# Altium PCB LCDTestor_LPC1788.PcbDoc
Units mm, origin at the board's own origin, x right, y up, seen from the top; angles counter-clockwise.
Board outline 152.4 x 101.6 mm, 2 copper layers (Top Layer, Bottom Layer); 149 components, 251 nets, 806 pads, 22 vias.
Unrouted connection lines stored in the file: 59.
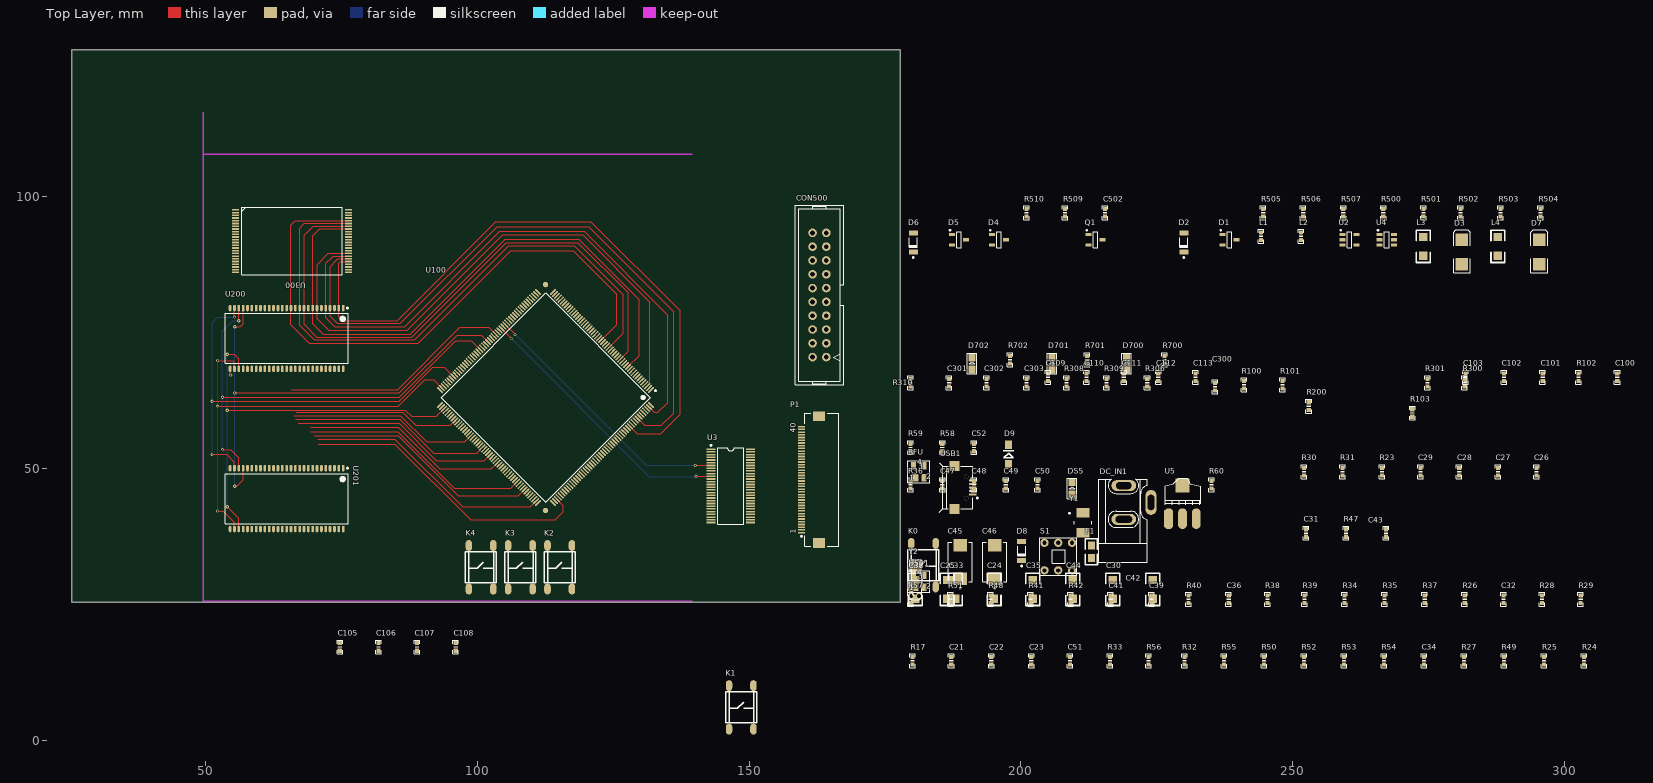
[diagram p0: Top Layer view]
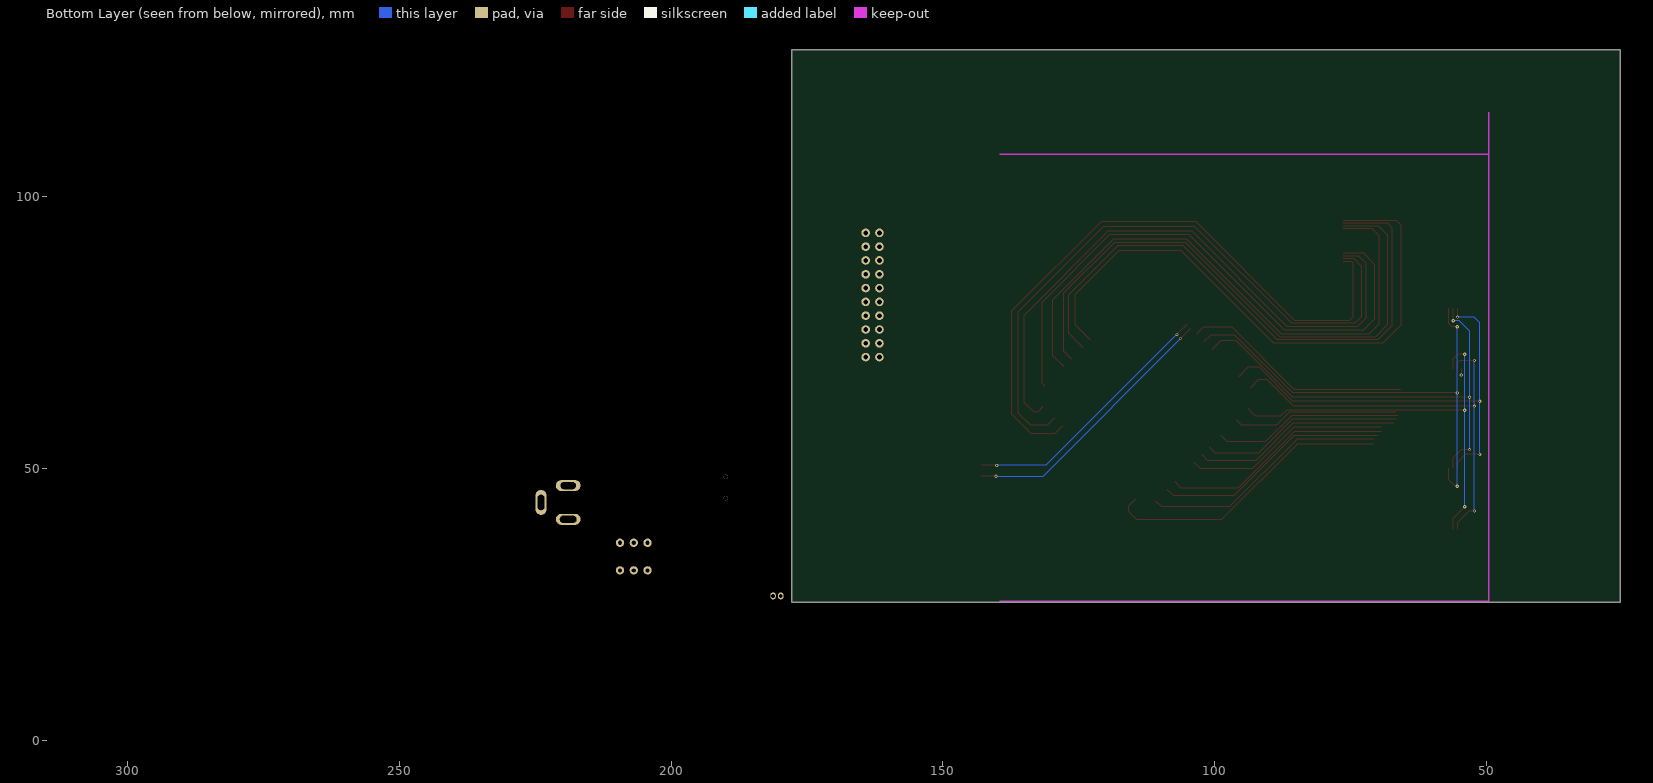
[diagram p1: Bottom Layer view, seen from below]

## Layer stack, top to bottom
Top Layer: signal copper 0.0356
Dielectric: dielectric 0.32, FR-4, Dk 4.8
Bottom Layer: signal copper 0.0356

## Board outline
25.4,25.4 177.8,25.4 177.8,127 25.4,127

## Design rules (kind name [scope] priority, off if disabled: settings)
Clearance [All] p1: gap=0.178
DiffPairsRouting [All] p1: maxlimit=0.254 minlimit=0.254 mostfreqgap=0.254 maxuncoupledlength=12.7
PolygonConnect [All] p1: connectstyle=Relief reliefconductorwidth=0.254 reliefentries=4 polygonreliefangle="90 Angle"
RoutingVias [All] p1: holewidth=0.3 width=0.6 viastyle="Through Hole" minholewidth=0.3 minwidth=0.6 maxholewidth=0.3 maxwidth=0.6
SilkToSilkClearance [All] p1: silktosilkclearance=0
SilkscreenOverComponentPads [All] p1: minsilkscreentomaskgap=0.01
SolderMaskExpansion [All] p1: expansion=0.102
Width [All] p1: maxlimit=1.524 minlimit=0.127 preferedwidth=0.254
25 further rules are at their usual default settings.

## Classes and differential pairs
component class 11)KEY,LED: D700 D701 D702 K1 K2 K3 K4 R700 R701 R702
component class 07)Power,JTAG,RESET: C45 C46 C47 C48 C49 C50 C502 CON500 CT500 CT501 CT502 CT503 D8 D500 D501 DC_IN1 DS5 DW500 DW501 DW502 DW503 F1 K0 K500 R36 R60 R500 R501 R502 R503 R504 R505 R506 R507 R509 R510 S1 TP500 TP501 TP502 TP503 U5 U500 U501 U502
component class 05)NorFlash,NandFlash: C300 C301 C302 C303 JP300 R300 R301 R306 R308 R309 R310 U300 U301 U302
component class 06)LCD: C21 C22 C23 C24 C25 C26 C27 C28 C29 C30 C31 C32 C33 C34 C35 C36 C37 C38 C39 C41 C42 C43 C44 C51 C400 C402 C404 C406 C411 C414 C418 C420 C422 D1 D2 D3 D4 D5 D6 D7 L1 L2 L3 L4 P1 Q1 R17 R23 R24 R25 R26 R27 R28 R29 R30 R31 R32 R33 R34 R35 R37 R38 R39 R40 R41 R42 R47 R48 R49 R50 R51 R52 R53 R54 R55 R56 R57 U2 U3 U4
component class 04)SDRAM: C200 C201 C202 C203 C204 C205 C206 C207 C208 C209 C210 C211 C212 C213 C304 C305 C306 C307 C308 C309 JP1 R8 R9 R10 R11 R12 R13 R14 R15 R16 R200 U6 U200 U201 VD6 VD7
net class D[31..0]: D0 D1 D2 D3 D4 D5 D6 D7 D8 D9 D10 D11 D12 D13 D14 D15 D16 D17 D18 D19 D20 D21 D22 D23 D24 D25 D26 D27 D28 D29 D30 D31 D500 D501 D502 D503 D504 D505 D506
net class A[23..0]: A0 A1 A2 A3 A4 A5 A6 A7 A8 A9 A10 A11 A12 A13 A14 A15 A16 A17 A18 A19 A20 A21 A22 A23
component class 03)CPU-3: C100 C101 C102 C103 C104 C105 C106 C107 C108 C109 C110 C111 C112 C113 C210 C211 C212 C213 P0_5 R100 R101 R102 R103 R201 R202 R203 VD2 VD3 VD4 X1 Y1 Y2
component class 01)CPU-1: U100
component class "10)USB HOST,USB Device,": BFU C52 D9 R58 R59 USB1
differential pair RXIN3: +RXIN3_P -RXIN3_N
differential pair RXIN2: +RXIN2_P -RXIN2_N
differential pair RXIN1: +RXIN1_P -RXIN1_N
differential pair RXIN0: +RXIN0_P -RXIN0_N
differential pair RXCLKIN: +RXCLKIN_P -RXCLKIN_N
differential pair USB_D: +USB_D_P -USB_D_N

## Components (designator, comment, footprint, x,y, rotation, side; value= is the part's Value field where it differs from the comment)
BFU "SP0503" SOT143 181.229,49.403 r0 top
C21 "104" 0603P 187.198,14.605 r90 top
C22 "104" 0603P 194.564,14.605 r90 top
C23 "104" 0603P 201.93,14.605 r90 top
C24 "10uF/25V" 1206 195.072,26.035 r90 top
C25 "10uF/25V" 1206 186.436,26.035 r90 top
C26 "104" 0603P 294.894,49.403 r90 top
C27 "104" 0603P 287.782,49.403 r90 top
C28 "104" 0603P 280.67,49.403 r90 top
C29 "104" 0603P 273.558,49.403 r90 top
C30 "10uF/25V" 1206 216.916,26.035 r90 top
C31 "104" 0603P 252.476,38.1 r90 top
C32 "104" 0603P 288.798,25.908 r90 top
C33 "10uF/25V" 1206 187.96,26.035 r90 top
C34 "104" 0603P 274.193,14.605 r90 top
C35 "2.2uF/25V" 1206 202.184,26.035 r90 top
C36 "104" 0603P 238.252,25.908 r90 top
C37 "10uF/25V" 1206 180.594,26.035 r90 top
C38 "10uF/25V" 1206 180.594,26.035 r90 top
C39 "104" 0603P 224.028,25.908 r90 top
C41 "104" 0603P 216.535,25.908 r90 top
C42 "10uF/25V" 1206 224.282,26.035 r90 top
C43 "104" 0603P 267.208,38.1 r90 top
C44 "2.2uF/25V" 1206 209.55,26.035 r90 top
C45 "Cap Tantalum" 7343 188.849,32.766 r90 top
C46 "Cap Tantalum" 7343 195.199,32.766 r90 top
C47 "22uF" 0603P 185.547,46.99 r90 top
C48 "22uF" 0603P 191.389,46.99 r90 top
C49 "104" 0603P 197.231,46.99 r90 top
C50 "104" 0603P 203.073,46.99 r90 top
C51 "104" 0603P 209.042,14.605 r90 top
C52 "104" 0603P 191.389,53.848 r90 top
C100 "22P" 0603P 309.753,66.802 r90 top
C101 "22P" 0603P 296.037,66.802 r90 top
C102 "22P" 0603P 288.925,66.802 r90 top
C103 "22P" 0603P 281.813,66.802 r90 top
C105 "104" 0603P 74.676,17.145 r90 top
C106 "104" 0603P 81.788,17.145 r90 top
C107 "104" 0603P 88.9,17.145 r90 top
C108 "104" 0603P 96.012,17.145 r90 top
C109 "104" 0603P 204.978,66.802 r90 top
C110 "104" 0603P 212.09,66.802 r90 top
C111 "104" 0603P 218.948,66.802 r90 top
C112 "104" 0603P 225.298,66.802 r90 top
C113 "104" 0603P 232.156,66.802 r90 top
C300 "104" 0603P 235.712,65.024 r90 top
C301 "104" 0603P 186.817,65.786 r90 top
C302 "104" 0603P 193.675,65.786 r90 top
C303 "104" 0603P 201.041,65.786 r90 top
C502 "104" 0603P 215.519,97.028 r90 top
CON500 "JTAG_20Pin" JTAG_20 162.941,81.915 r90 top
D1 "BAV99" SOT-23-3L 238.379,92.075 r0 top
D2 "ZMM18" LL-34 229.997,91.567 r90 top
D3 "MBR0520" DSO-C2/X2.3 281.178,89.789 r90 top
D4 "BAV99" SOT-23-3L 195.961,92.075 r0 top
D5 "BAV99" SOT-23-3L 188.595,92.075 r0 top
D6 "ZMM10" LL-34 180.213,91.567 r90 top
D7 "MBR0520" DSO-C2/X2.3 295.402,89.789 r90 top
D8 "ZMM5V1" LL-34 200.152,34.798 r90 top
D9 "1N4148" DIODE_SOP 197.739,50.8 r90 top
D700 "LED" SMDLED 219.456,68.199 r90 top
D701 "LED" SMDLED 205.74,68.199 r90 top
D702 "LED" SMDLED 191.008,68.199 r90 top
DC_IN1 "POWER" DC10B 223.266,36.195 r90 top
DS5 "LED1" SMDLED 209.423,45.212 r90 top
F1 "Fuse 1" 0805 212.979,33.528 r90 top
K0 "KEY_M" K贴片 179.832,28.194 r0 top
K1 "KEY_M" K贴片 146.304,2.032 r0 top
K2 "KEY_M" K贴片 112.903,27.813 r0 top
K3 "KEY_M" K贴片 105.664,27.813 r0 top
K4 "KEY_M" K贴片 98.425,27.813 r0 top
L1 "Inductor" 0603P 244.221,92.71 r90 top
L2 "Inductor" 0603P 251.587,92.71 r90 top
L3 "Inductor" 1206 274.066,89.154 r90 top
L4 "Inductor" 1206 287.782,89.154 r90 top
P1 "MHDR2X20" FH12A-40S-0.5SH 161.264,47.938 r90 top
Q1 "2N3904" SOT-23-3L 213.741,92.075 r0 top
R17 "1.5K" 0603P 180.086,14.605 r90 top
R23 "10K" 0603P 266.446,49.403 r90 top
R24 "10K" 0603P 303.657,14.605 r90 top
R25 "100K  %1" 0603P 296.291,14.605 r90 top
R26 "10K" 0603P 281.686,25.908 r90 top
R27 "100K" 0603P 281.559,14.605 r90 top
R28 "10K" 0603P 295.91,25.908 r90 top
R29 "10K" 0603P 303.022,25.908 r90 top
R30 "10K" 0603P 252.095,49.403 r90 top
R31 "10K" 0603P 259.207,49.403 r90 top
R32 "0" 0603P 230.124,14.605 r90 top
R33 "12.4K  %1" 0603P 216.408,14.605 r90 top
R34 "10K" 0603P 259.588,25.908 r90 top
R35 "10K" 0603P 266.954,25.908 r90 top
R36 "0" 0603P 179.705,46.99 r90 top
R37 "10K" 0603P 274.32,25.908 r90 top
R38 "10K" 0603P 245.364,25.908 r90 top
R39 "0" 0603P 252.222,25.908 r90 top
R40 "10K" 0603P 230.886,25.908 r90 top
R41 "270R" 0603P 201.803,25.908 r90 top
R42 "10K" 0603P 209.169,25.908 r90 top
R47 "10K" 0603P 259.842,38.1 r90 top
R48 "10K" 0603P 194.437,25.908 r90 top
R49 "10K" 0603P 288.925,14.605 r90 top
R50 "0" 0603P 244.729,14.605 r90 top
R51 "10K" 0603P 187.071,25.908 r90 top
R52 "1.1" 0603P 252.095,14.605 r90 top
R53 "1.2" 0603P 259.461,14.605 r90 top
R54 "1.1" 0603P 266.827,14.605 r90 top
R55 "3K" 0603P 237.363,14.605 r90 top
R56 "82K" 0603P 223.52,14.605 r90 top
R57 "4.8K" 0603P 179.705,25.908 r90 top
R58 "22" 0603P 185.547,53.848 r90 top
R59 "22" 0603P 179.705,53.848 r90 top
R60 "1K" 0603P 235.077,46.99 r90 top
R100 "0R" 0603P 241.046,65.405 r90 top
R101 "0R" 0603P 248.158,65.405 r90 top
R102 "1M" 0603P 302.641,66.802 r90 top
R103 "0R" 0603P 272.034,60.198 r90 top
R200 "10K" 0603P 252.984,61.468 r90 top
R300 "10K" 0603P 281.686,65.786 r90 top
R301 "10K" 0603P 274.828,65.786 r90 top
R306 "4k7" 0603P 223.266,65.786 r90 top
R308 "4k7" 0603P 208.407,65.786 r90 top
R309 "4k7" 0603P 215.773,65.786 r90 top
R310 "4k7" 0603P 179.705,65.786 r90 top
R500 "10K" 0603P 266.7,97.028 r90 top
R501 "10K" 0603P 274.066,97.028 r90 top
R502 "10K" 0603P 280.924,97.028 r90 top
R503 "10K" 0603P 288.29,97.028 r90 top
R504 "10K" 0603P 295.656,97.028 r90 top
R505 "10K" 0603P 244.602,97.028 r90 top
R506 "10K" 0603P 251.968,97.028 r90 top
R507 "10K" 0603P 259.334,97.028 r90 top
R509 "10K" 0603P 208.153,97.028 r90 top
R510 "200R" 0603P 201.041,97.028 r90 top
R700 "100R" 0603P 226.441,69.977 r90 top
R701 "100R" 0603P 212.217,69.977 r90 top
R702 "100R" 0603P 197.993,69.977 r90 top
S1 "SW-SPDT" 自锁开关6 204.343,31.242 r0 top
U2 "MP1541DJ" SOT-23-5L 260.477,92.075 r0 top
U3 "SN75LVDS83B" DGG056 146.627,46.796 r270 top
U4 "MP3202DJ" SOT-23-6L 267.335,92.075 r0 top
U5 "AMS1117-3.3" AMS1117 227.203,40.767 r0 top
U100 "LPC1788" LQFP208_28X28X05P 112.539,63.048 r225 top
U200 "K4S561632D" 54_TSOP2_400AF_L 64.897,73.914 r270 top
U201 "K4S561632D" 54_TSOP2_400AF_L 64.897,44.45 r270 top
U300 "K9K1G08U0A" TSOP48 65.913,91.821 r0 top
U501 "MAX811T" SOT143 181.229,29.21 r0 top
USB1 "USB_Receptacle" Micro_USB 189.484,46.482 r0 top
Y1 "8MHz" SMD2_50X32 211.455,40.005 r0 top
Y2 "32.768K" XTAL32 179.832,26.543 r90 top

## Footprints (in the part's own frame and the unit in brackets; to place one, negate y for a bottom-side part, rotate by r counter-clockwise, add the part's x,y. Pads: shape width x height; smd on the part's side, far side on the other; paste and mask are expansions set on the pad)
54_TSOP2_400AF_L [mm] "SOP, 54-Leads, Body 22.5x10.16mm, Pitch 0.8mm, IPC High Density"
  oval 1.2x0.5 smd: 1(-5.6,10.4) 2(-5.6,9.6) 3(-5.6,8.8) 4(-5.6,8) 5(-5.6,7.2) 6(-5.6,6.4) 7(-5.6,5.6) 8(-5.6,4.8) 9(-5.6,4) 10(-5.6,3.2) 11(-5.6,2.4) 12(-5.6,1.6) 13(-5.6,0.8) 14(-5.6,0) 15(-5.6,-0.8) 16(-5.6,-1.6) 17(-5.6,-2.4) 18(-5.6,-3.2) 19(-5.6,-4) 20(-5.6,-4.8) 21(-5.6,-5.6) 22(-5.6,-6.4) 23(-5.6,-7.2) 24(-5.6,-8) 25(-5.6,-8.8) 26(-5.6,-9.6) 27(-5.6,-10.4) 28(5.6,-10.4) 29(5.6,-9.6) 30(5.6,-8.8) 31(5.6,-8) 32(5.6,-7.2) 33(5.6,-6.4) 34(5.6,-5.6) 35(5.6,-4.8) 36(5.6,-4) 37(5.6,-3.2) 38(5.6,-2.4) 39(5.6,-1.6) 40(5.6,-0.8) 41(5.6,0) 42(5.6,0.8) 43(5.6,1.6) 44(5.6,2.4) 45(5.6,3.2) 46(5.6,4) 47(5.6,4.8) 48(5.6,5.6) 49(5.6,6.4) 50(5.6,7.2) 51(5.6,8) 52(5.6,8.8) 53(5.6,9.6) 54(5.6,10.4)
  silkscreen extent -5.72,-11.3 4.6,11.33, body extent -5.08,-11.23 5.08,11.23, height 1.2
0603P [mil]
  rect 30x30 smd: 1(-27,0) 2(27.5,-0.06)
  silkscreen extent -50,-20 50,20
0805 [mil]
  rect 60x50 smd: 1(0,-0.06) 2(90,-0.06)
  silkscreen extent -50,-45 140,45
1206 [mil]
  rect 60x60 smd: 1(0,0) 2(135,0)
  silkscreen extent -50,-50 185,50
7343 [mm]
  rect 2.3x2.5 smd: 1(-3.1,0) 2(3.1,0)
  silkscreen extent -4.87,-2.2 3.65,2.2
AMS1117 [mil]
  oct 65x150 smd: 1(0.03,-0.06)
  oval 65x150 smd: 2(100.03,-0.06) 3(200.03,-0.06)
  rect 100x100 smd: 4(100.03,239.94)
  silkscreen extent -26,100 234,293
DC10B [mil]
  oval 80x180 hole 50 slot 110 at 90 deg: 1(419.09,170)
  oval 80x180 hole 50 slot 120 at 90 deg: 2(175,170)
  oval 180x80 hole 50 slot 110 at 0 deg: 3(297.05,-26.85)
  silkscreen extent -138,0 465,350
DGG056 [mm]
  rect 0.3x1.65 smd: 1(-6.75,-3.625) 2(-6.25,-3.625) 3(-5.75,-3.625) 4(-5.25,-3.625) 5(-4.75,-3.625) 6(-4.25,-3.625) 7(-3.75,-3.625) 8(-3.25,-3.625) 9(-2.75,-3.625) 10(-2.25,-3.625) 11(-1.75,-3.625) 12(-1.25,-3.625) 13(-0.75,-3.625) 14(-0.25,-3.625) 15(0.25,-3.625) 16(0.75,-3.625) 17(1.25,-3.625) 18(1.75,-3.625) 19(2.25,-3.625) 20(2.75,-3.625) 21(3.25,-3.625) 22(3.75,-3.625) 23(4.25,-3.625) 24(4.75,-3.625) 25(5.25,-3.625) 26(5.75,-3.625) 27(6.25,-3.625) 28(6.75,-3.625) 29(6.75,3.625) 30(6.25,3.625) 31(5.75,3.625) 32(5.25,3.625) 33(4.75,3.625) 34(4.25,3.625) 35(3.75,3.625) 36(3.25,3.625) 37(2.75,3.625) 38(2.25,3.625) 39(1.75,3.625) 40(1.25,3.625) 41(0.75,3.625) 42(0.25,3.625) 43(-0.25,3.625) 44(-0.75,3.625) 45(-1.25,3.625) 46(-1.75,3.625) 47(-2.25,3.625) 48(-2.75,3.625) 49(-3.25,3.625) 50(-3.75,3.625) 51(-4.25,3.625) 52(-4.75,3.625) 53(-5.25,3.625) 54(-5.75,3.625) 55(-6.25,3.625) 56(-6.75,3.625)
  silkscreen extent -7.57,-3.75 7.05,2.4
DIODE_SOP [mm]
  rect 1.5x1.3 smd: 1(0,0) 2(3.556,0)
  silkscreen extent 1.14,-1.02 2.56,1.02
DSO-C2/X2.3 [mm] "DO-214-AA/SMB; 2 C-Bend Leads; Body 5.3 x 3.6 mm, inc. leads (LxW)"
  rect 2.3x2.3 smd: 1(-2.25,0) 2(2.25,0)
  silkscreen extent -3.8,-1.55 4.1,1.55
FH12A-40S-0.5SH [mm]
  rect 0.3x1.3 smd: 1(-9.75,1.625) 2(-9.25,1.625) 3(-8.75,1.625) 4(-8.25,1.625) 5(-7.75,1.625) 6(-7.25,1.625) 7(-6.75,1.625) 8(-6.25,1.625) 9(-5.75,1.625) 10(-5.25,1.625) 11(-4.75,1.625) 12(-4.25,1.625) 13(-3.75,1.625) 14(-3.25,1.625) 15(-2.75,1.625) 16(-2.25,1.625) 17(-1.75,1.625) 18(-1.25,1.625) 19(-0.75,1.625) 20(-0.25,1.625) 21(0.25,1.625) 22(0.75,1.625) 23(1.25,1.625) 24(1.75,1.625) 25(2.25,1.625) 26(2.75,1.625) 27(3.25,1.625) 28(3.75,1.625) 29(4.25,1.625) 30(4.75,1.625) 31(5.25,1.625) 32(5.75,1.625) 33(6.25,1.625) 34(6.75,1.625) 35(7.25,1.625) 36(7.75,1.625) 37(8.25,1.625) 38(8.75,1.625) 39(9.25,1.625) 40(9.75,1.625)
  rect 1.8x2.2 smd: 41(-11.65,-1.625) 42(11.65,-1.625)
  silkscreen extent -12.25,-5.2 12.25,1.75
JTAG_20 [mil]
  round 62 hole 35: 1(-450,-50) 2(-450,50) 3(-350,-50) 4(-350,50) 5(-250,-50) 6(-250,50) 7(-150,-50) 8(-150,50) 9(-50,-50) 10(-50,50) 11(50,-50) 12(50,50) 13(150,-50) 14(150,50) 15(250,-50) 16(250,50) 17(350,-50) 18(350,50) 19(450,-50) 20(450,50)
  silkscreen extent -650,-175 650,175
K贴片 [mm]
  oval 1.2x2 smd: 1(0,0) 1(0,8) 2(4.5,0) 2(4.5,8)
  silkscreen extent -0.64,1.14 5.08,6.86
LL-34 [mm]
  rect 0.95x1.65 smd: 1(-1.75,0) 2(1.75,0)
  silkscreen extent -2.87,-0.75 0.9,0.75
LQFP208_28X28X05P [mm]
  oval 1.5x0.3 smd: 1(-14.7,12.75) 2(-14.7,12.25) 3(-14.7,11.75) 4(-14.7,11.25) 5(-14.7,10.75) 6(-14.7,10.25) 7(-14.7,9.75) 8(-14.7,9.25) 9(-14.7,8.75) 10(-14.7,8.25) 11(-14.7,7.75) 12(-14.7,7.25) 13(-14.7,6.75) 14(-14.7,6.25) 15(-14.7,5.75) 16(-14.7,5.25) 17(-14.7,4.75) 18(-14.7,4.25) 19(-14.7,3.75) 20(-14.7,3.25) 21(-14.7,2.75) 22(-14.7,2.25) 23(-14.7,1.75) 24(-14.7,1.25) 25(-14.7,0.75) 26(-14.7,0.25) 27(-14.7,-0.25) 28(-14.7,-0.75) 29(-14.7,-1.25) 30(-14.7,-1.75) 31(-14.7,-2.25) 32(-14.7,-2.75) 33(-14.7,-3.25) 34(-14.7,-3.75) 35(-14.7,-4.25) 36(-14.7,-4.75) 37(-14.7,-5.25) 38(-14.7,-5.75) 39(-14.7,-6.25) 40(-14.7,-6.75) 41(-14.7,-7.25) 42(-14.7,-7.75) 43(-14.7,-8.25) 44(-14.7,-8.75) 45(-14.7,-9.25) 46(-14.7,-9.75) 47(-14.7,-10.25) 48(-14.7,-10.75) 49(-14.7,-11.25) 50(-14.7,-11.75) 51(-14.7,-12.25) 52(-14.7,-12.75) 105(14.7,-12.75) 106(14.7,-12.25) 107(14.7,-11.75) 108(14.7,-11.25) 109(14.7,-10.75) 110(14.7,-10.25) 111(14.7,-9.75) 112(14.7,-9.25) 113(14.7,-8.75) 114(14.7,-8.25) 115(14.7,-7.75) 116(14.7,-7.25) 117(14.7,-6.75) 118(14.7,-6.25) 119(14.7,-5.75) 120(14.7,-5.25) 121(14.7,-4.75) 122(14.7,-4.25) 123(14.7,-3.75) 124(14.7,-3.25) 125(14.7,-2.75) 126(14.7,-2.25) 127(14.7,-1.75) 128(14.7,-1.25) 129(14.7,-0.75) 130(14.7,-0.25) 131(14.7,0.25) 132(14.7,0.75) 133(14.7,1.25) 134(14.7,1.75) 135(14.7,2.25) 136(14.7,2.75) 137(14.7,3.25) 138(14.7,3.75) 139(14.7,4.25) 140(14.7,4.75) 141(14.7,5.25) 142(14.7,5.75) 143(14.7,6.25) 144(14.7,6.75) 145(14.7,7.25) 146(14.7,7.75) 147(14.7,8.25) 148(14.7,8.75) 149(14.7,9.25) 150(14.7,9.75) 151(14.7,10.25) 152(14.7,10.75) 153(14.7,11.25) 154(14.7,11.75) 155(14.7,12.25) 156(14.7,12.75)
  oval 0.3x1.5 smd: 53(-12.75,-14.7) 54(-12.25,-14.7) 55(-11.75,-14.7) 56(-11.25,-14.7) 57(-10.75,-14.7) 58(-10.25,-14.7) 59(-9.75,-14.7) 60(-9.25,-14.7) 61(-8.75,-14.7) 62(-8.25,-14.7) 63(-7.75,-14.7) 64(-7.25,-14.7) 65(-6.75,-14.7) 66(-6.25,-14.7) 67(-5.75,-14.7) 68(-5.25,-14.7) 69(-4.75,-14.7) 70(-4.25,-14.7) 71(-3.75,-14.7) 72(-3.25,-14.7) 73(-2.75,-14.7) 74(-2.25,-14.7) 75(-1.75,-14.7) 76(-1.25,-14.7) 77(-0.75,-14.7) 78(-0.25,-14.7) 79(0.25,-14.7) 80(0.75,-14.7) 81(1.25,-14.7) 82(1.75,-14.7) 83(2.25,-14.7) 84(2.75,-14.7) 85(3.25,-14.7) 86(3.75,-14.7) 87(4.25,-14.7) 88(4.75,-14.7) 89(5.25,-14.7) 90(5.75,-14.7) 91(6.25,-14.7) 92(6.75,-14.7) 93(7.25,-14.7) 94(7.75,-14.7) 95(8.25,-14.7) 96(8.75,-14.7) 97(9.25,-14.7) 98(9.75,-14.7) 99(10.25,-14.7) 100(10.75,-14.7) 101(11.25,-14.7) 102(11.75,-14.7) 103(12.25,-14.7) 104(12.75,-14.7) 157(12.75,14.7) 158(12.25,14.7) 159(11.75,14.7) 160(11.25,14.7) 161(10.75,14.7) 162(10.25,14.7) 163(9.75,14.7) 164(9.25,14.7) 165(8.75,14.7) 166(8.25,14.7) 167(7.75,14.7) 168(7.25,14.7) 169(6.75,14.7) 170(6.25,14.7) 171(5.75,14.7) 172(5.25,14.7) 173(4.75,14.7) 174(4.25,14.7) 175(3.75,14.7) 176(3.25,14.7) 177(2.75,14.7) 178(2.25,14.7) 179(1.75,14.7) 180(1.25,14.7) 181(0.75,14.7) 182(0.25,14.7) 183(-0.25,14.7) 184(-0.75,14.7) 185(-1.25,14.7) 186(-1.75,14.7) 187(-2.25,14.7) 188(-2.75,14.7) 189(-3.25,14.7) 190(-3.75,14.7) 191(-4.25,14.7) 192(-4.75,14.7) 193(-5.25,14.7) 194(-5.75,14.7) 195(-6.25,14.7) 196(-6.75,14.7) 197(-7.25,14.7) 198(-7.75,14.7) 199(-8.25,14.7) 200(-8.75,14.7) 201(-9.25,14.7) 202(-9.75,14.7) 203(-10.25,14.7) 204(-10.75,14.7) 205(-11.25,14.7) 206(-11.75,14.7) 207(-12.25,14.7) 208(-12.75,14.7)
  round 1 smd: 209(-14.7,-14.7) 210(14.7,14.7)
  silkscreen extent -15.32,-13.6 13.6,13.6
Micro_USB [mm]
  rect 1.35x0.4 smd: 1(1.679,1.3) 2(1.679,0.65) 3(1.679,0) 4(1.679,-0.65) 5(1.679,-1.3)
  rect 1.9x1.9 smd: 6(-1.679,-3.95) ""(-1.679,3.95)
  silkscreen extent -4.46,-4.57 2.64,4.57
SMD2_50X32 [mm]
  rect 2.4x1.7 smd: 1(0,1.85) 2(0,-1.85)
  silkscreen extent -2.62,-0.25 1.6,1.87
SMDLED [mm]
  rect 1.4x1.27 smd: 1(0.001,-0.002) 2(2.211,-0.002)
  silkscreen extent -0.8,-0.89 3.01,0.89
SOT143 [mm]
  rect 1.35x1.35 smd: 1(-0.75,-1.1)
  rect 0.9x1.35 smd: 2(0.95,-1.1) 3(0.95,1.1) 4(-0.95,1.1)
  silkscreen extent -2,-2 2,2
SOT-23-3L [mm]
  rect 1.1x0.6 smd: 1(-1.3,0.95) 2(-1.3,-0.95) 3(1.3,0)
  silkscreen extent -1.72,-1.45 0.43,1.87
SOT-23-5L [mm]
  rect 1.1x0.6 smd: 1(-1.3,0.95) 2(-1.3,0) 3(-1.3,-0.95) 4(1.3,-0.95) 5(1.3,0.95)
  silkscreen extent -1.72,-1.45 0.43,1.87
SOT-23-6L [mm]
  rect 1.1x0.6 smd: 1(-1.3,0.95) 2(-1.3,0) 3(-1.3,-0.95) 4(1.3,-0.95) 5(1.3,0) 6(1.3,0.95)
  silkscreen extent -1.72,-1.45 0.43,1.87
TSOP48 [mm] "TSOP48"
  rect 1.295x0.305 smd: 1(-10.4,5.75) 2(-10.4,5.25) 3(-10.4,4.75) 4(-10.4,4.25) 5(-10.4,3.75) 6(-10.4,3.25) 7(-10.4,2.75) 8(-10.4,2.25) 9(-10.4,1.75) 10(-10.4,1.25) 11(-10.4,0.75) 12(-10.4,0.25) 13(-10.4,-0.25) 14(-10.4,-0.75) 15(-10.4,-1.25) 16(-10.4,-1.75) 17(-10.4,-2.25) 18(-10.4,-2.75) 19(-10.4,-3.25) 20(-10.4,-3.75) 21(-10.4,-4.25) 22(-10.4,-4.75) 23(-10.4,-5.25) 24(-10.4,-5.75) 25(10.4,-5.75) 26(10.4,-5.25) 27(10.4,-4.75) 28(10.4,-4.25) 29(10.4,-3.75) 30(10.4,-3.25) 31(10.4,-2.75) 32(10.4,-2.25) 33(10.4,-1.75) 34(10.4,-1.25) 35(10.4,-0.75) 36(10.4,-0.25) 37(10.4,0.25) 38(10.4,0.75) 39(10.4,1.25) 40(10.4,1.75) 41(10.4,2.25) 42(10.4,2.75) 43(10.4,3.25) 44(10.4,3.75) 45(10.4,4.25) 46(10.4,4.75) 47(10.4,5.25) 48(10.4,5.75)
  silkscreen extent -9.23,-6.2 9.2,6.2
XTAL32 [mil]
  oval 50x40 hole 28: 1(0,0) 2(0,-56)
  rect 92.13x86 smd: ""(220,-27)
  silkscreen extent -28,-77 264,25
自锁开关6 [mil]
  round 60 hole 30: 1(0,0) 2(100,0) 3(200,0) 4(200,200) 5(100,200) 6(0,200)
  silkscreen extent -35,-35 235,235

## Part data
BFU: "Capacitor"
C21 C22 C23 C24 C25 C26 C27 C28 C29 C30 C31 C32 C33 C34 C35 C36 C37 C38 C39 C41 C42 C43 C44 C51: library part C
C45 C46: "Polarized Capacitor (Surface Mount)"
C47 C48 C49 C50 C52: library part C_2
C100 C101 C102 C103 C105 C106 C107 C108 C109 C110 C111 C112 C113 C300 C301 C302 C303: library part C_Generic_Dup2
C502: library part C_Generic_Dup1
D2 D6 D8: library part "D Zener", "Zener Diode"
D3 D7: library part "D Schottky", "Schottky Diode"
D9: library part D
DC_IN1: library part POW
DS5: library part LED2, "Typical RED, GREEN, YELLOW, AMBER GaAs LED"
F1: "Fuse"
P1: "Header, 20-Pin, Dual row"
Q1: "NPN General Purpose Amplifier"
R17 R23 R24 R25 R26 R27 R28 R29 R30 R31 R32 R33 R34 R35 R36 R37 R38 R39 R40 R41 R42 R47 R48 R49 R50 R51 R52 R53 R54 R55 R56 R57 R58 R59 R60: library part R
R100 R101 R102 R103 R700 R701 R702: library part R_Generic_Dup2
R200 R300 R301 R306 R308 R309 R310 R500 R501 R502 R503 R504 R505 R506 R507 R509 R510: library part R_Generic_Dup1
S1: "SPDT Subminiature Toggle Switch, Right Angle Mounting, Vertical Actuation"
U2: library part MP1541
U4: library part MP3202
U5: library part AMS1117
U501: library part UD215_1
USB1: library part 300008272, "B型USB插座，Series “B” Receptacles，Right Angle, T/H，4POS"
Y1: library part XTAL, "Crystal Oscillator"
Y2: library part XTAL_1, "Crystal Oscillator"

## Via types
v1: diameter 0.6, hole 0.3, Top Layer to Bottom Layer, tented both sides, 20 vias
v2: diameter 0.8, hole 0.8, Top Layer to Bottom Layer, 2 vias

## Nets (pads, with @x,y where several pads share a name; then routed paths per layer and width w, separated by ;. In a path a pad name is that pad's centre, name@x,y a point inside that pad or via, vN(x,y) a via of type N, cw(c..) or ccw(c..) an arc to the next point about the centre after c; other vN are vias at no path point)
+3V3: C21.2 C22.2 C23.2 C46.1 C48.2 C49.2 C50.2 C105.1 C106.1 C107.1 C108.1 C109.1 C110.1 C111.1 C112.1 C113.1 C300.1 C301.1 C302.1 C303.1 L1.2 L2.2 R28.2 R29.1 R30.1 R31.2 R40.1 R48.1 R57.1 R100.2 R101.2 R200.2 R300.2 R301.1 R306.1 R308.1 R309.1 R509.1 U3.1 U3.9 U3.26 U5.2 U5.4 U100.15 U100.26 U100.60 U100.71 U100.86 U100.89 U100.112 U100.125 U100.146 U100.165 U100.174 U100.181 U100.198 U200.1 U200.3 U200.9 U200.14 U200.27 U200.43 U200.49 U201.1 U201.3 U201.9 U201.14 U201.27 U201.43 U201.49 U300.12 U300.37 U501.4
A0: U100.75 U200.23 U201.23 | length 42.9
  Top Layer w0.178: 65.786,64.516 85.344,64.516 96.774,75.946 102.115,75.946 U100.75
A1: U100.79 U200.24 U201.24 | length 89.7
  Top Layer w0.178: v1(55.372,46.736) 55.753,46.736 56.897,47.88 U201.24 ; v1(55.372,63.881) 85.598,63.881 96.266,74.549 100.684,74.549 U100.79 ; v1(55.372,76.073) 56.388,76.073 56.897,76.582 U200.24
  Bottom Layer w0.178: v1(55.372,46.736) v1(55.372,63.881) v1(55.372,76.073)
A2: U100.83 U200.25 U201.25 | length 86.6
  Top Layer w0.178: v1(53.086,53.467) 54.61,53.467 56.097,51.98 U201.25 ; v1(53.086,63.119) 63.754,63.119 ; v1(56.097,77.179) U200.25 ; 63.119,63.119 63.754,63.119 ; U100.83 98.872,73.533 96.012,73.533 85.598,63.119 63.754,63.119
  Bottom Layer w0.178: v1(53.086,53.467) 53.086,75.274 54.991,77.179 v1(56.097,77.179)
A3: U100.97 U200.26 U201.26 | length 83.9
  Top Layer w0.178: v1(51.181,52.578) 53.848,52.578 55.297,51.129 U201.26 ; v1(51.181,62.357) 85.598,62.357 91.821,68.58 93.925,68.58 U100.97 ; v1(55.297,77.851) U200.26
  Bottom Layer w0.178: v1(51.181,52.578) v1(51.181,62.357) 51.181,76.835 52.197,77.851 v1(55.297,77.851)
A4: U100.103 U200.29 U201.29 | length 81.2
  Top Layer w0.178: v1(52.197,42.164) 53.213,42.164 55.297,40.08 U201.29 ; v1(52.197,61.468) 85.471,61.468 90.297,66.294 91.968,66.294 U100.103 ; v1(52.197,69.85) 54.991,69.85 55.297,69.544 U200.29
  Bottom Layer w0.178: v1(52.197,42.164) v1(52.197,61.468) v1(52.197,69.85)
A5: U100.107 U200.30 U201.30 | length 78.3
  Top Layer w0.178: v1(53.975,42.926) 56.097,40.804 U201.30 ; v1(53.975,60.706) 86.741,60.706 87.884,59.563 92.437,59.563 U100.107 ; v1(53.975,70.993) 55.245,70.993 56.097,70.141 U200.30
  Bottom Layer w0.178: v1@53.93,60.751 v1(53.975,60.706) ; v1(53.975,42.926) v1(53.975,60.706) ; v1(53.975,70.993) v1(53.975,60.706)
A6: U100.113 U200.31 U201.31 | length 30.7
  Top Layer w0.178: 66.675,60.325 86.233,60.325 88.646,57.912 95.029,57.912 U100.113
A7: U100.121 U200.32 U201.32 | length 35
  Top Layer w0.178: 66.294,59.69 85.852,59.69 90.678,54.864 97.637,54.864 U100.121
A8: U100.127 U200.33 U201.33 | length 37.4
  Top Layer w0.178: 66.548,59.055 85.725,59.055 91.948,52.832 99.848,52.832 U100.127
A9: U100.131 U200.34 U201.34 | length 38.5
  Top Layer w0.178: 67.056,58.293 85.598,58.293 92.456,51.435 101.279,51.435 U100.131
A10: U100.135 U200.22 U201.22 | length 38
  Top Layer w0.178: 69.342,57.531 85.471,57.531 93.091,49.911 102.584,49.911 U100.135
A11: U100.145 U200.35 U201.35 | length 42.7
  Top Layer w0.178: 69.342,56.769 85.344,56.769 95.758,46.355 106.099,46.355 U100.145
A12: U100.149 U200.36 U201.36 | length 43.8
  Top Layer w0.178: 69.977,56.007 85.471,56.007 96.52,44.958 107.53,44.958 U100.149
A13: U100.155 U200.20 U201.20 | length 45.8
  Top Layer w0.178: 70.612,55.372 84.836,55.372 97.282,42.926 109.741,42.926 U100.155
A14: U100.159 U200.21 U201.21 | length 54.3
  Top Layer w0.178: 70.739,54.483 84.836,54.483 98.806,40.513 114.3,40.513 115.824,42.037 115.824,43.146 U100.159
A15: U100.173
A16: U100.101
A17: U100.104
A18: U100.105
A19: U100.111 U300.17
A20: U100.109 U300.16
A21: U100.115
A22: U100.123
A23: U100.129
AVDD: C33.2 C35.1 D3.2 D4.1 P1.27 R25.2
BL_DIM: R56.1
BL_EN: R32.1 R39.1 R50.1
CAN_RD1: U100.94
CAN_TD1: U100.96
CS1#: R309.2 U100.193
D0: U100.197 U200.2 U300.29 | length 119.6
  Top Layer w0.178: U300.29 74.736,88.071 74.497,87.832 U200.2 74.497,77.903 75.184,77.216 85.217,77.216 103.378,95.377 120.904,95.377 137.287,78.994 137.287,59.944 133.731,56.388 129.452,56.388 U100.197
D1: U100.201 U200.4 U300.30 | length 117.6
  Top Layer w0.178: U300.30 74.347,88.571 72.897,87.121 U200.4 72.897,77.979 74.168,76.708 85.852,76.708 103.632,94.488 120.523,94.488 136.144,78.867 136.144,60.198 133.858,57.912 130.756,57.912 U100.201
D2: U100.207 U200.5 U300.31 | length 112.6
  Top Layer w0.178: U300.31 73.45,89.071 72.097,87.718 U200.5 72.097,77.763 73.787,76.073 86.614,76.073 104.14,93.599 119.634,93.599 135.001,78.232 135.001,62.103 133.223,60.325 132.586,60.325 U100.207
D3: U100.3 U200.7 U300.32 | length 106.8
  Top Layer w0.178: U300.32 72.553,89.571 70.497,87.515 U200.7 70.497,77.585 72.644,75.438 87.122,75.438 104.648,92.964 119.38,92.964 131.729,80.615 131.729,65.68 131.242,65.193 U100.3
D4: U100.13 U200.8 U300.41 | length 109.3
  Top Layer w0.178: U300.41 70.957,94.071 69.697,92.811 U200.8 69.697,76.607 71.628,74.676 87.63,74.676 105.156,92.202 118.618,92.202 129.794,81.026 129.794,70.757 U100.13
D5: U100.17 U200.10 U300.42 | length 109.8
  Top Layer w0.178: U300.42 69.806,94.571 68.097,92.862 U200.10 68.097,76.556 70.485,74.168 87.884,74.168 105.283,91.567 118.491,91.567 127.762,82.296 127.762,71.554 U100.17
D6: U100.23 U200.11 U300.43 | length 109.7
  Top Layer w0.178: U300.43 68.147,95.071 67.297,94.221 U200.11 67.297,76.34 69.977,73.66 88.519,73.66 105.791,90.932 117.856,90.932 126.873,81.915 126.873,74.907 U100.23
D7: U100.27 U200.13 U300.44 | length 110.6
  Top Layer w0.178: U300.44 66.488,95.571 65.697,94.78 U200.13 65.697,76.416 69.088,73.025 89.154,73.025 106.172,90.043 117.602,90.043 125.603,82.042 125.603,76.466 U100.27
D8: U100.191 U200.42
D9: U100.199 U200.44
D10: U100.205 U200.45
D11: U100.208 U200.47
D12: U100.1 U200.48
D13: U100.7 U200.50
D14: R306.2 U100.21 U200.51
D15: R310.1 U100.28 U200.53
D16: U100.137 U201.2
D17: U100.143 U201.4
D18: U100.151 U201.5
D19: U100.161 U201.7
D20: U100.167 U201.8
D21: U100.175 U201.10
D22: U100.195 U201.11
D23: U100.65 U201.13
D24: U100.58 U201.42
D25: U100.56 U201.44
D26: U100.55 U201.45
D27: U100.203 U201.47
D28: U100.5 U201.48
D29: U100.11 U201.50
D30: U100.19 U201.51
D31: U100.25 U201.53
D_N: BFU.3 R58.1 USB1.2
D_P: BFU.4 R59.1 USB1.3
DAC_OUT: U100.12
DQM0: U100.49 U200.15
DQM1: U100.43 U200.39
DQM2: U100.31 U201.15
DQM3: U100.39 U201.39
DYCS0#: R200.1 U100.73 U200.19 U201.19
EMC_CAS#: U100.87 U200.17 U201.17
EMC_CKE0: U100.53 U200.37 U201.37
EMC_CLK0: U100.59 U200.38 U201.38
EMC_CS2#: U100.91
EMC_CS3#: U100.99
EMC_RAS#: U100.95 U200.18 U201.18
EMC_WE#: U100.179 U200.16 U201.16 U300.18
ENET_CRS_DV: U100.190
ENET_MDC: U100.180
ENET_MDIO: U100.178
ENET_REF_CLK: U100.182
ENET_RX_ER: U100.184
ENET_RXD0: U100.188
ENET_RXD1: U100.186
ENET_TX_EN#: U100.192
ENET_TXD0: U100.196
ENET_TXD1: U100.194
GND: BFU.1 C21.1 C22.1 C23.1 C24.2 C25.2 C27.2 C28.1 C29.1 C30.2 C34.1 C35.2 C36.1 C37.1 C38.1 C41.1 C42.2 C43.1 C44.2 C45.2 C46.2 C47.1 C48.1 C49.1 C50.1 C51.1 C52.1 D2.1 D5.2 D6.2 D8.1 DC_IN1.2 DC_IN1.3 DS5.2 K1.1 K2.1 K3.1 K4.1 P1.9 P1.12 P1.15 P1.18 P1.21 P1.24 P1.26 P1.28 P1.33 R33.1 R34.2 R35.2 R37.2 R38.2 R42.2 R51.2 R52.2 R53.2 R54.2 U2.2 U3.5 U3.13 U3.21 U3.29 U3.33 U3.35 U3.36 U3.43 U3.49 U3.53 U4.2 U5.1 USB1.4 USB1.5 USB1.6
GND_POWER: C100.2 C101.2 C102.2 C103.2 C105.2 C106.2 C107.2 C108.2 C109.2 C110.2 C111.2 C112.2 C113.2 C300.2 C301.2 C302.2 C303.2 C502.2 CON500.4 CON500.6 CON500.8 CON500.10 CON500.12 CON500.14 CON500.16 CON500.18 CON500.20 D700.2 D701.2 D702.2 K0.2 R103.2 R310.2 R505.2 R506.2 R507.2 U100.32 U100.33 U100.63 U100.77 U100.84 U100.93 U100.114 U100.133 U100.148 U100.169 U100.172 U100.189 U100.200 U200.6 U200.12 U200.28 U200.41 U200.46 U200.52 U200.54 U201.6 U201.12 U201.28 U201.41 U201.46 U201.52 U201.54 U300.13 U300.36 U501.1 | length 1.2
  Top Layer w0.178: U200.28@54.483,68.3 U200.28 54.497,67.296 v1(54.61,67.183)
I2C0_SCL: U100.48
I2C0_SDA: U100.50
L/R: P1.7 R28.1 R37.1
LCD_DCLK: U100.150
LCD_DCLK: U3.31
LCD_EN: U100.142
LCD_EN: U3.30
LCD_FP: U100.144
LCD_FP: U3.28
LCD_LE: U100.152
LCD_LP: U100.140
LCD_LP: U3.27
LED+: C44.1 D7.2 P1.39 P1.40 U4.5
LED-: P1.35 P1.36 R49.2 R52.1 R53.1 R54.1
NetBFU_2: BFU.2 C52.2 D9.1 USB1.1
NetC24_1: C24.1 D1.2 R17.2
NetC26_1: C26.1 D1.3
NetC28_2: C28.2 L1.1 U3.34
NetC29_2: C29.2 L2.1 U3.44
NetC32_2: C32.2 D4.3
NetC33_1: C33.1 D1.1 D4.2
NetC34_2: C34.2 R24.2 R32.2 U2.4
NetC37_2: C37.2 D5.1 R41.2
NetC39_2: C39.2 D5.3
NetC51_2: C51.2 R55.1 R56.2
NetC100_1: C100.1 R102.2 U100.34 Y1.2
NetC101_1: C101.1 R102.1 U100.36 Y1.1
NetC102_1: C102.1 U100.44 Y2.1
NetC103_1: C103.1 U100.46 Y2.2
NetC502_1: C502.1 K0.1 R36.1 R509.2 U501.3
NetCON500_11: CON500.11 R503.2
NetCON500_17: CON500.17 R506.1
NetCON500_19: CON500.19 R507.1
NetD7_1: D7.1 L4.2 U4.1
NetD700_1: D700.1 R700.2
NetD701_1: D701.1 R701.2
NetD702_1: D702.1 R702.2
NetDC_IN1_1: DC_IN1.1 S1.2
NetDS5_1: DS5.1 R60.2
NetF1_1: F1.1 S1.3
NetQ1_1: Q1.1 R23.2 R26.1
NetR25_1: R25.1 R27.2 R33.2
NetR26_2: R26.2 R34.1
NetR27_1: R27.1 U2.3
NetR47_2: R47.2 R50.2 U4.4
NetR48_2: R48.2 R51.1 U3.17
NetR49_1: R49.1 R55.2 U4.3
NetR57_2: R57.2 U3.32
NetR100_1: R100.1 U100.24
NetR101_1: R101.1 U100.20
NetR103_1: R103.1 U100.22
NetR300_1: R300.1 U300.7
NetR301_2: R301.2 U300.19
NetR510_1: R510.1 U501.2
NNAND_CS#: R308.2 U100.187 U300.9
NNAND_RE#: U100.183 U300.8
NRST: CON500.15 R36.2 R510.2 U100.35
P0_4: U3.51 U100.168
P0_5: U3.52 U100.166
P0_12: U100.41
P0_23: U100.18
P0_24: U100.16
P0_25: U100.14
P1_12: R700.1 U100.157
P1_13: R701.1 U100.147
P1_18: U100.66
P1_31: U100.40
P2_10: U100.110
P2_11: K1.2 U100.108
P2_19: K2.2 U100.67
P2_21: K3.2 U100.81
P2_25: K4.2 U100.54
P4_26: U100.119
P4_27: U100.139
P5_0: U100.9
P5_1: U100.30
P5_2: U100.117
PWM0_1: U100.185
PWM0_2: U100.177
PWM0_3: U100.156
PWM0_4: U100.171
PWM0_5: U100.153
PWM0_6: U100.163
PWM1_1: U100.154
RESET: C36.2 P1.5 R29.2
RSTOUT#: U100.29
RSVD: U3.25
RTC_ALARM_MVT: R702.1 U100.37
RXCLKIN_N: P1.10 U3.40
RXCLKIN_P: P1.11 U3.39
RXIN0_N: P1.13 U3.48
RXIN0_P: P1.14 U3.47
RXIN1_N: P1.16 U3.46
RXIN1_P: P1.17 U3.45
RXIN2_N: P1.19 U3.42
RXIN2_P: P1.20 U3.41
RXIN3_N: P1.22 U3.38
RXIN3_P: P1.23 U3.37
SELB: P1.25 R40.2 R42.1
SSP0_MISO: U100.57
SSP0_MOSI: U100.47
SSP0_SCK: U100.85
SSP0_SSEL: U100.64
STBYB: P1.8 R31.1 R39.2
SW: C26.2 C32.1 C39.1 D3.1 L3.2 U2.1
TCK(SWDCLK): CON500.9 R505.1 U100.10
TDI: CON500.5 R501.2 U100.4
TDO(SWO): CON500.13 R504.2 U100.2
TMS(SWDIO): CON500.7 R502.2 U100.6
TRST#: CON500.3 R500.2 U100.8
U0_RXD: U100.204
U0_TXD: U100.202
U1_CTS: U100.126
U1_DCD: U100.124
U1_DSR: U100.122
U1_DTR: U100.120
U1_RI: U100.118
U1_RTS: U100.116
U1_RXD: U100.130
U1_TXD: U100.128
U2_OE: U100.68
U2_RXD: U100.100
U2_TXD: U100.98
U4_RXD: U100.141
U4_TXD: U100.206
U/D: P1.6 R30.2 R38.1
USB_CONNECT: U100.69
USB_D_D2+: U100.51 U100.52
USB_D_N: R58.2 U100.62
USB_D_P: R59.2 U100.61
USB_LED: U100.45
USB_VBUS: U100.42
VCC5V: C30.1 C31.2 C42.1 C43.2 C45.1 C47.2 D8.2 D9.2 F1.2 L3.1 L4.1 Q1.3 R23.1 R24.1 R47.1 R60.1 U2.5 U4.6 U5.3
VCC_3V3: CON500.1 CON500.2 R500.1 R501.1 R502.1 R503.1 R504.1
VCC_RTC: U100.38
VCOM: P1.1 Q1.2 R35.1
VD2: U3.54 U100.170
VD3: U3.55 U100.176
VD4: U3.56 U100.138
VD5: U3.3 U100.136
VD6: U3.50 U100.134
VD7: U3.2 U100.132
VD8: U3.4 U100.164
VD9: U3.6 U100.162
VD10: U3.7 U100.70 | length 48.6
  Top Layer w0.178: U100.70 v1(106.934,74.663) ; v1(140.081,50.546) U3.7
  Bottom Layer w0.178: v1(106.934,74.663) 131.051,50.546 v1(140.081,50.546)
VD11: U3.11 U100.72 | length 49.9
  Top Layer w0.178: U100.72 v1(106.269,73.914) ; v1(140.24,48.546) U3.11
  Bottom Layer w0.178: v1(106.269,73.914) 131.669,48.514 140.208,48.514 v1(140.24,48.546)
VD12: U3.12 U100.74
VD13: U3.14 U100.76
VD14: U3.8 U100.78
VD15: U3.10 U100.80
VD16: U3.15 U100.160
VD17: U3.19 U100.158
VD18: U3.20 U100.106
VD19: U3.22 U100.102
VD20: U3.23 U100.82
VD21: U3.24 U100.88
VD22: U3.16 U100.90
VD23: U3.18 U100.92
VDD: P1.2 P1.3
VGH: C25.1 C27.1 D2.2 P1.29 R17.1
VGL: C38.2 C41.2 D6.1 P1.32 R41.1
pads on no net: C31.1 P1.4 P1.30 P1.31 P1.34 P1.37 P1.38 P1.41 P1.42 S1.1 S1.4 S1.5 S1.6 U100.209 U100.210 U200.40 U201.40 U300.1 U300.2 U300.3 U300.4 U300.5 U300.6 U300.10 U300.11 U300.14 U300.15 U300.20 U300.21 U300.22 U300.23 U300.24 U300.25 U300.26 U300.27 U300.28 U300.33 U300.34 U300.35 U300.38 U300.39 U300.40 U300.45 U300.46 U300.47 U300.48 USB1. Y2.
copper on no net:
  other v2: 189.955,44.482 189.955,48.482

## Keep-outs
Keep-Out Layer:
  lines w0.254: 49.53,107.823 139.53,107.823 ; 49.53,115.57 49.53,25.57 139.53,25.57

## Text inside footprints (layer, text, board x,y; h text height)
BFU: Top Overlay "3" at 181.102,49.911 h1; Top Overlay "2" at 182.626,48.006 h1; Top Overlay "1" at 179.508,47.733 h1; Top Overlay "4" at 180.975,50.673 h1
C45: Mechanical 1 "C1" at 189.299,32.229 h1 r90
C46: Mechanical 1 "C1" at 195.649,32.229 h1 r90
D1: Mechanical 1 "U1" at 238.739,91.661 h1 r90
D4: Mechanical 1 "U1" at 196.321,91.661 h1 r90
D5: Mechanical 1 "U1" at 188.955,91.661 h1 r90
P1: Top Overlay "1" at 158.539,37.938 h1 r90; Top Overlay "40" at 158.539,56.588 h1 r90
Q1: Mechanical 1 "U1" at 214.101,91.661 h1 r90
U2: Mechanical 15 "1" at 260.927,91.911 h1 r90
U4: Mechanical 15 "1" at 267.785,91.911 h1 r90
U300: Mechanical 8 "1" at 55.139,97.514 h1; Mechanical 8 "2" at 55.139,97.014 h1; Mechanical 8 "20" at 54.935,88.014 h1; Mechanical 8 "21" at 54.935,87.514 h1; Mechanical 8 "22" at 54.935,87.014 h1; Mechanical 8 "23" at 54.935,86.514 h1; Mechanical 8 "24" at 54.935,86.014 h1; Mechanical 8 "25" at 75.735,86.014 h1; Mechanical 8 "26" at 75.735,86.514 h1; Mechanical 8 "27" at 75.735,87.014 h1; Mechanical 8 "28" at 75.735,87.514 h1; Mechanical 8 "33" at 75.735,90.014 h1; Mechanical 8 "3" at 55.139,96.514 h1; Mechanical 8 "34" at 75.735,90.514 h1; Mechanical 8 "35" at 75.735,91.014 h1; Mechanical 8 "38" at 75.735,92.514 h1; Mechanical 8 "39" at 75.735,93.014 h1; Mechanical 8 "40" at 75.735,93.514 h1; Mechanical 8 "45" at 75.735,96.014 h1; Mechanical 8 "46" at 75.735,96.514 h1; Mechanical 8 "47" at 75.735,97.014 h1; Mechanical 8 "48" at 75.735,97.514 h1; Mechanical 8 "4" at 55.139,96.014 h1; Mechanical 8 "5" at 55.139,95.514 h1; Mechanical 8 "6" at 55.139,95.014 h1; Mechanical 8 "10" at 54.935,93.014 h1; Mechanical 8 "11" at 54.935,92.514 h1; Mechanical 8 "14" at 54.935,91.014 h1; Mechanical 8 "15" at 54.935,90.514 h1; Mechanical 8 "9" at 55.139,93.514 h1; Mechanical 8 "8" at 55.139,94.014 h1; Mechanical 8 "18" at 54.935,89.014 h1; Mechanical 8 "17" at 54.935,89.514 h1; Mechanical 8 "16" at 54.935,90.014 h1; Mechanical 8 "19" at 54.935,88.514 h1; Mechanical 8 "42" at 75.735,94.514 h1; Mechanical 8 "31" at 75.735,89.014 h1; Mechanical 8 "43" at 75.735,95.014 h1; Mechanical 8 "30" at 75.735,88.514 h1; Mechanical 8 "41" at 75.735,94.014 h1; Mechanical 8 "32" at 75.735,89.514 h1; Mechanical 8 "44" at 75.735,95.514 h1; Mechanical 8 "29" at 75.735,88.014 h1; Mechanical 8 "13" at 54.935,91.514 h1; Mechanical 8 "36" at 75.735,91.514 h1; Mechanical 8 "12" at 54.935,92.014 h1; Mechanical 8 "37" at 75.735,92.014 h1; Mechanical 8 "7" at 55.139,94.514 h1
U501: Top Overlay "4" at 180.975,30.48 h1; Top Overlay "1" at 179.508,27.54 h1; Top Overlay "2" at 182.626,27.813 h1; Top Overlay "3" at 181.102,29.718 h1